# Altium PCB MainPCBV6.PcbDoc (part 3 of 5)
Units mm, origin at the board's own origin, x right, y up, seen from the top; angles counter-clockwise.
Board outline 176 x 144.01 mm, 2 copper layers (Top Layer, Bottom Layer); 220 components, 240 nets, 911 pads, 254 vias.
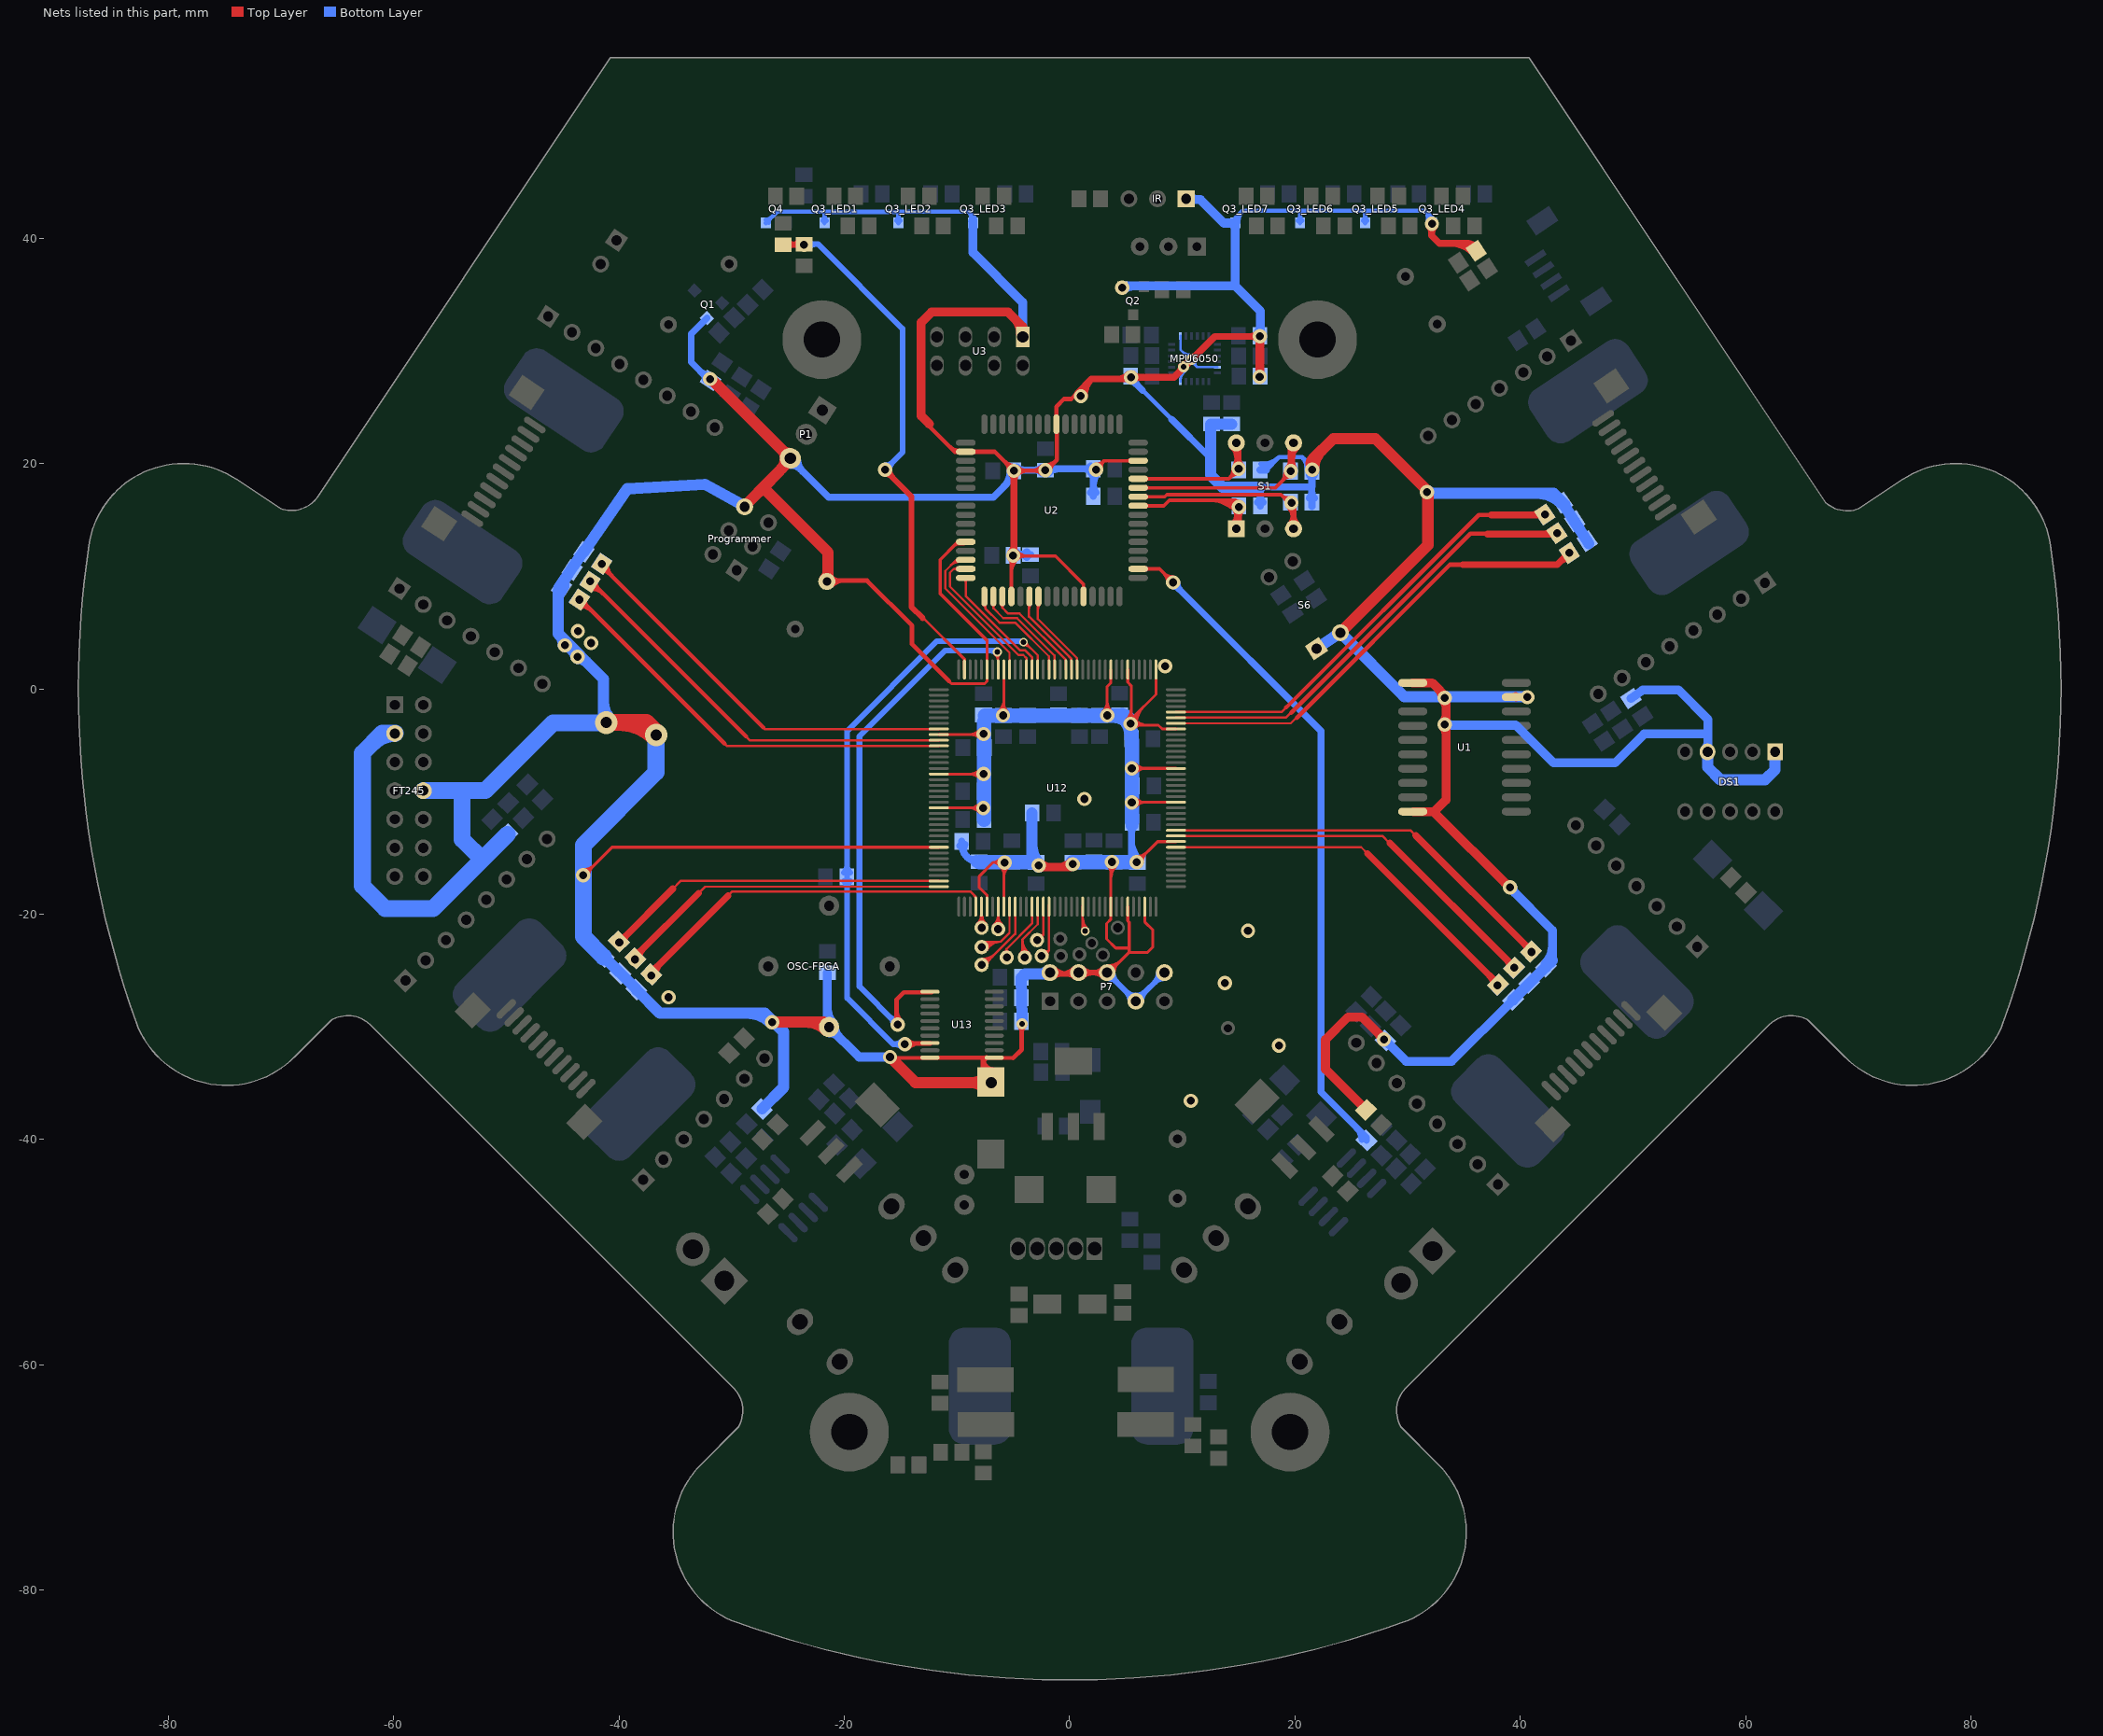
[diagram p3: the nets of this part, all layers, seen from the top]

## Via types
v1: diameter 1.27, hole 0.711, Top Layer to Bottom Layer, 214 vias
v2: diameter 1, hole 0.5, Top Layer to Bottom Layer, 17 vias
v3: diameter 2, hole 1, Top Layer to Bottom Layer, 11 vias
v4: diameter 0.8, hole 0.5, Top Layer to Bottom Layer, 8 vias
v5: diameter 1.778, hole 0.965, Top Layer to Bottom Layer, 3 vias
v6: diameter 0.75, hole 0.5, Top Layer to Bottom Layer, 1 vias

## Nets (pads, with @x,y where several pads share a name; then routed paths per layer and width w, separated by ;. In a path a pad name is that pad's centre, name@x,y a point inside that pad or via, vN(x,y) a via of type N, cw(c..) or ccw(c..) an arc to the next point about the centre after c; other vN are vias at no path point) (continued)
CUR_MAIN_O: R45.1 U2.2 | length 64.3
  Top Layer w0.305: U2.2@6.075,10.65 7.969,10.65 v1(9.169,9.449) ; U2.2@6.762,10.563 cw(c6.971,10.354) 6.971,10.65 cw(c6.971,10.946) U2.2@6.762,10.736 ; v1@8.687,9.449 ccw(c7.522,9.449) 8.346,10.273 ccw(c9.169,11.097) v1@9.169,9.931
  Bottom Layer w0.6: v1@9.119,9.449 v1(9.169,9.449) ; v1@9.169,9.114 cw(c9.169,8.428) 9.655,8.913 ; v1@9.504,9.449 ccw(c10.436,9.449) 9.777,8.79 ; 9.652,8.915 22.314,-3.747 22.314,-35.802 26.354,-39.841 R45.1@26.354,-40.093 ; 25.508,-38.995 cw(c24.481,-40.022) R45.1@25.933,-40.022
D0: U2.46 U12.63 | length 14.5
  Top Layer w0.203: -10.526,10.986 cw(c-9.825,10.285) U2.46@-9.825,11.276 ; -10.179,11.333 cw(c-9.825,10.979) U2.46@-9.825,11.479 ; U2.46@-9.225,11.45 -10.062,11.45 -11.044,10.467 -11.044,8.911 -5.342,3.209 U12.63@-5.342,1.711
D1: U2.47 U12.60 | length 13.4
  Top Layer w0.2: U2.47@-9.968,10.55 ccw(c-10.16,10.416) -10.16,10.65 ; U2.47@-9.968,10.75 cw(c-10.16,10.883) -10.16,10.65 ; U2.47@-9.949,10.526 ccw(c-10.247,10.227) -10.247,10.65 ccw(c-10.247,11.072) U2.47@-9.949,10.773 ; U12.60@-3.842,1.711 -3.842,2.725 -4.123,3.005 -4.555,3.005 -10.643,9.093 -10.643,10.301 -10.294,10.65 -10.16,10.65
D2: U2.48 U12.59 | length 11.5
  Top Layer w0.203: U2.48@-9.347,9.727 cw(c-9.643,9.431) -9.225,9.431 cw(c-8.806,9.431) U2.48@-9.102,9.727 ; U2.48@-9.225,9.85 -9.225,8.26 -4.379,3.414 -3.947,3.414 -3.342,2.809 U12.59@-3.342,1.711
D3: U2.49 U12.56 | length 10.1
  Top Layer w0.203: U2.49@-7.669,7.454 cw(c-7.879,7.13) -7.493,7.13 ; U2.49@-7.575,8.2 -7.493,8.118 -7.493,7.137 -6.236,5.88 -4.839,5.88 -1.842,2.884 U12.56@-1.842,1.711
D4: U2.50 U12.55 | length 10.1
  Top Layer w0.203: U2.50@-6.897,7.477 cw(c-7.193,7.181) -6.775,7.181 cw(c-6.356,7.181) U2.50@-6.652,7.477 ; U2.50@-6.775,8.2 -6.775,7.156 -5.902,6.283 -4.672,6.283 -1.342,2.954 U12.55@-1.342,1.711
D5: U2.51 U12.53 | length 10.3
  Top Layer w0.203: U2.51@-6.095,7.474 cw(c-6.362,7.194) -5.975,7.194 ; U2.51@-5.975,8.2 -5.975,7.194 ; U2.51@-5.855,7.474 ccw(c-5.587,7.194) -5.975,7.194 ; -0.455,2.691 cw(c-0.671,2.475) U12.53@-0.366,2.475 ; U12.53@-0.342,1.711 -0.342,2.578 -4.45,6.686 -5.467,6.686 -5.975,7.194
D6: U2.54 U12.52 | length 9.1
  Top Layer w0.203: U2.54@-3.697,7.477 cw(c-3.916,7.258) -3.607,7.258 ; -3.607,7.104 cw(c-3.079,7.104) U2.54@-3.452,7.477 ; U2.54@-3.575,8.2 -3.607,8.168 -3.607,6.413 0.158,2.649 U12.52@0.158,1.711 ; -0.005,2.811 cw(c-0.341,2.475) U12.52@0.134,2.475
D7: U2.55 U12.51 | length 8.5
  Top Layer w0.203: U2.55@-2.897,7.477 cw(c-3.086,7.289) -2.819,7.289 ; -2.819,7.073 cw(c-2.249,7.073) U2.55@-2.652,7.477 ; U2.55@-2.819,8.155 -2.819,6.196 0.658,2.719 U12.51@0.658,1.711
DIN: U12.65 U13.1 | length 54.9
  Top Layer w0.203: v4@-6.637,3.066 cw(c-7.349,2.353) U12.65@-6.342,2.353 ; v4@-6.494,3.209 cw(c-6.859,2.844) -6.342,2.844 ; U12.65@-6.342,1.711 v4@-6.342,3.302 ; -6.342,2.759 cw(c-5.909,2.759) v4@-6.215,3.066
  Top Layer w0.4: v1@-15.573,-29.512 ccw(c-16.086,-28.999) -15.361,-28.999 ; -15.361,-28.54 ccw(c-13.985,-28.54) v1@-14.958,-29.512 ; v1(-15.265,-29.82) -15.361,-29.724 -15.361,-27.578 -14.732,-26.949 U13.1@-12.243,-26.949
  Bottom Layer w0.508: v1@-15.646,-29.82 ccw(c-16.566,-29.82) -15.916,-29.169 ccw(c-15.265,-28.519) v1@-15.265,-29.439 ; v1@-15.291,-29.794 -18.669,-26.416 -18.669,-4.216 -11.049,3.404 -6.553,3.404 v4(-6.426,3.277) ; -7.085,3.404 cw(c-7.085,2.618) v4@-6.529,3.173
DONE: R32.1 R34.1 U12.71 | length 57.2
  Top Layer w0.254: -13.005,6.299 -9.342,2.637 U12.71@-9.342,1.711 ; -9.453,2.747 cw(c-9.725,2.475) U12.71@-9.34,2.475
  Top Layer w0.508: R34.1@-25.425,39.436 -23.383,39.436 R32.1@-23.343,39.395 ; R34.1@-25.045,39.156 cw(c-24.369,38.48) -24.369,39.436 cw(c-24.369,40.392) R34.1@-25.045,39.716 ; R34.1@-24.676,39.436 ccw(c-24.676,40.462) R32.1@-23.951,39.736 ; -24.578,39.436 cw(c-24.578,38.55) R32.1@-23.951,39.176 ; -24.514,39.436 cw(c-24.514,38.496) R32.1@-23.849,39.161 ; -24.485,39.436 ccw(c-24.485,40.335) R32.1@-23.849,39.699 ; v1@-16.464,19.502 -14.046,17.085 -14.046,7.27 -13.04,6.264 ; v1@-16.383,19.075 cw(c-16.383,18.24) -15.792,18.831 ; v1@-16.002,19.456 ccw(c-14.998,19.456) -15.708,18.747
  Bottom Layer w0.508: v1(-23.579,39.43) -23.538,39.472 -22.352,39.472 -22.327,39.446 -22.301,39.446 ; v1@-23.31,39.161 cw(c-22.559,38.41) -22.559,39.472 ; v1@-23.31,39.699 ccw(c-22.76,40.249) -22.76,39.472 ; -22.285,39.43 -14.834,31.979 -14.834,21.006 v1@-16.459,19.38 ; v1(-16.383,19.456) -16.358,19.456 v1@-16.256,19.355 ; v1@-16.383,19.837 ccw(c-16.383,20.757) -15.733,20.107 ccw(c-15.082,19.456) v1@-16.002,19.456
GND: C7.1 C8.1 C9.1 C10.1 C29.2 C30.1 C31.1 C32.1 C33.2 C34.1 C35.1 C36.1 C37.1 C38.1 C39.1 C40.1 C41.1 C42.1 C43.1 C44.1 C45.1 C46.1 C47.1 C48.1 C49.1 C50.1 C51.1 C52.1 C53.1 C54.1 C55.1 C56.1 C57.1 C58.1 C59.1 C60.1 C101.1 C102.1 C103.1 C104.1 C105.1 C106.1 DS1.1 DS1.4 FB?.1 FT245.3 FT245.8 IR.1 MPU6050.1 MPU6050.11 MPU6050.18 OSC-FPGA.2 P1.3 P7.2 P7.4 P7.6 P7.7 P7.10 Programmer.6 Q1.3 Q2.3 Q3_LED1.3 Q3_LED2.3 Q3_LED3.3 Q3_LED4.3 Q3_LED5.3 Q3_LED6.3 Q3_LED7.3 Q4.3 R3.1 R4.1 R5.1 R6.1 R8.2 R26.2 R46_drivermotor1.1 R46_drivermotor2.1 R46_drivermotor3.1 R46_drivermotor4.1 R47_drivermotor1.1 R47_drivermotor2.1 R47_drivermotor3.1 R47_drivermotor4.1 R48_drivermotor1.1 R48_drivermotor2.1 R48_drivermotor3.1 R48_drivermotor4.1 Reset1.1 S6.1 S6.2 U1.1 U1.10 U1.19 U2.14 U2.24 U2.34 U2.44 U2.52 U2.60 U3.1 U12.9 U12.16 U12.22 U12.29 U12.37 U12.42 U12.45 U12.64 U12.67 U12.81 U12.88 U12.94 U12.101 U12.114 U12.117 U12.136 U12.139 U12.142 U13.10 U13.11 | length 1103.7
  Top Layer w0.254: v1@-43.18,-16.307 ccw(c-43.18,-15.571) -42.66,-16.091 ; v1@-43.18,-16.053 ccw(c-43.18,-14.704) -42.226,-15.658 ; v1@-43.078,-16.51 -40.632,-14.064 U12.101@-11.617,-14.064 ; v1@-42.672,-16.561 cw(c-41.568,-16.561) -42.349,-15.78 ; U12.94@-11.617,-10.564 v1@-7.62,-10.564 ; U12.88@-11.617,-7.564 -7.702,-7.564 v1@-7.696,-7.569 ; U12.81@-11.617,-4.064 v1@-7.569,-4.064 ; -10.719,0.686 -10.49,0.457 -7.544,0.457 -7.342,0.659 U12.67@-7.342,1.711 -7.342,4.294 ; -8.994,-4.064 ccw(c-8.994,-2.665) v1@-8.005,-3.654 ; -8.965,-10.564 cw(c-8.965,-11.886) v1@-8.03,-10.951 ; -8.885,-7.564 cw(c-8.885,-8.809) v1@-8.005,-7.928 ; -8.859,-7.564 ccw(c-8.859,-6.356) v1@-8.005,-7.21 ; -8.83,-10.564 ccw(c-8.83,-9.433) v1@-8.03,-10.233 ; -8.75,-4.064 cw(c-8.75,-5.117) v1@-8.005,-4.372 ; -8.381,-4.064 ccw(c-8.381,-3.278) v1@-7.825,-3.834 ; -8.352,-10.564 cw(c-8.352,-11.273) v1@-7.85,-10.771 ; U12.114@-7.342,-19.339 -7.342,-18.312 -8.052,-17.602 -8.052,-16.662 -6.807,-15.418 ; v1@-6.277,-2.003 ccw(c-7.328,-0.952) -5.842,-0.952 ; v1@-6.198,-15.723 ccw(c-6.807,-16.18) -6.807,-15.418 ; v1@-6.198,-15.113 cw(c-6.807,-14.656) -6.807,-15.418 ; v1@-6.15,-15.777 cw(c-6.894,-16.521) -5.842,-16.521 ; v1@-6.098,-2.183 ccw(c-6.715,-1.566) -5.842,-1.566 ; v1@-5.867,-15.418 -6.807,-15.418 ; v1@-5.867,-2.413 -5.842,-2.388 U12.64@-5.842,1.711 ; U12.117@-5.842,-19.339 v1@-5.842,-15.418 ; -5.842,-16.767 cw(c-4.442,-16.767) v1@-5.432,-15.777 ; -5.842,-16.154 cw(c-5.055,-16.154) v1@-5.612,-15.597 ; -5.842,-1.319 ccw(c-4.875,-1.319) v1@-5.559,-2.003 ; v1@2.921,-2.413 3.327,-2.007 3.327,0.203 3.658,0.534 U12.45@3.658,1.711 ; v1@2.968,-2.003 ccw(c2.101,-1.136) 3.327,-1.136 ccw(c4.554,-1.136) v1@3.687,-2.003 ; P7.6@3.305,-25.175 P7.6@3.378,-25.248 ; P7.6@3.327,-24.828 ccw(c3.327,-23.569) 4.217,-24.459 ; P7.6@3.327,-24.574 ccw(c3.327,-22.702) 4.651,-24.026 ; P7.6@3.378,-25.171 3.505,-25.171 5.283,-23.393 5.283,-20.731 5.158,-20.605 U12.139@5.158,-19.339 ; v1@3.4,-15.726 cw(c2.778,-16.349) 3.658,-16.349 ; 3.658,-16.838 cw(c5.23,-16.838) v1@4.118,-15.726 ; 3.658,-16.225 cw(c4.617,-16.225) v1@3.939,-15.547 ; v1@3.658,-15.341 U12.136@3.658,-19.339 3.658,-20.454 3.277,-20.835 3.277,-22.2 4.089,-23.012 5.283,-23.012 ; P7.6@3.95,-25.197 cw(c5.087,-25.197) 4.283,-24.393 ; v1@5.051,-2.74 ccw(c4.061,-1.75) 5.461,-1.75 ; U12.42@5.158,1.711 5.158,0.583 5.461,0.279 5.461,-3.226 7.874,-3.226 8.212,-3.564 U12.29@9.433,-3.564 ; v1@5.207,-3.175 5.639,-3.175 5.664,-3.15 5.664,-2.489 7.658,-0.496 U12.37@7.658,1.711 ; v1@5.231,-2.919 ccw(c4.674,-2.363) 5.461,-2.363 ; 5.334,-23.419 6.883,-23.419 7.391,-22.911 7.391,-21.42 6.658,-20.687 U12.142@6.658,-19.339 ; v1(5.41,-3.099) cw(c6.269,-3.099) 5.662,-2.492 ; v1@5.41,-2.591 ccw(c5.41,-2.223) 5.67,-2.483 ; v1@5.461,-10.058 5.466,-10.064 U12.16@9.433,-10.064 ; 5.461,-1.995 ccw(c6.514,-1.995) 5.769,-2.74 ccw(c6.943,-1.566) 6.943,-3.226 ; v1@5.486,-7.064 U12.22@9.433,-7.064 ; v1@5.59,-2.919 ccw(c6.33,-2.179) 6.33,-3.226 ccw(c6.33,-4.019) v1@5.769,-3.458 ; v1@5.664,-3.099 cw(c7.136,-3.099) 6.095,-2.058 ; v1@5.691,-10.263 cw(c6.173,-10.745) 6.173,-10.064 ; v1@5.871,-10.443 cw(c6.787,-11.359) 6.787,-10.064 ; v1@5.871,-9.725 ccw(c6.69,-8.906) 6.69,-10.064 ; v1@5.871,-7.42 cw(c6.732,-8.281) 6.732,-7.064 ; v1@5.871,-6.702 ccw(c6.745,-5.828) 6.745,-7.064 ; v1@5.918,-3.099 cw(c8.003,-3.099) 6.529,-1.625 ; v1@5.944,-15.138 ccw(c5.944,-14.464) 6.421,-14.941 ; v1@5.944,-14.884 ccw(c5.944,-13.597) 6.854,-14.507 ; v1@5.969,-15.392 7.798,-13.564 U12.9@9.433,-13.564 ; v1@6.452,-15.392 cw(c7.617,-15.392) 6.793,-14.569
  Top Layer w0.305: -10.183,12.779 cw(c-9.825,12.42) U2.44@-9.825,12.927 ; U2.44@-9.861,12.932 ccw(c-9.927,12.719) -10.085,12.877 ; U2.44@-9.225,13.05 -9.397,12.877 -10.085,12.877 ; -7.342,4.294 -11.498,8.45 -11.498,11.463 -10.085,12.877 ; v1@-5.36,11.495 cw(c-5.808,11.047) -5.175,11.047 ; U2.52@-5.261,8.886 ccw(c-5.471,9.096) -5.175,9.096 ccw(c-4.879,9.096) U2.52@-5.088,8.886 ; U2.52@-5.175,8.2 -5.175,11.764 -5.197,11.786 -1.27,11.786 1.225,9.29 U2.60@1.225,8.2 ; -5.175,10.295 cw(c-3.478,10.295) -4.678,11.495 cw(c-3.977,10.794) -3.977,11.786 ; -5.175,11.031 cw(c-4.214,11.031) v1@-4.893,11.711 ; v1@-4.678,12.178 ccw(c-3.731,13.124) -3.731,11.786 ; U2.60@1.139,8.886 ccw(c0.929,9.096) 1.225,9.096 ccw(c1.521,9.096) U2.60@1.312,8.886 ; v1@2.098,19.533 2.337,19.533 3.051,20.247 6.073,20.247 U2.14@6.075,20.25 ; v1@2.337,19.939 ccw(c2.337,20.92) 3.031,20.226 ; v1@2.814,19.528 cw(c3.646,19.652) 3.051,20.247 ; 5.173,20.247 ccw(c5.173,20.552) U2.14@5.389,20.336 ; 5.185,20.247 cw(c5.185,19.96) U2.14@5.389,20.163
  Top Layer w0.381: -12.471,23.52 -12.471,23.317 -10.204,21.05 U2.34@-9.225,21.05 -6.638,21.05 v1(-4.943,19.355) -4.94,19.357 -2.095,19.357 -1.134,20.319 -1.134,23.458 U2.24@-1.175,23.5 -1.175,25.063 -0.508,25.73 0.127,25.73 v1@0.686,26.289 ; -10.616,21.462 ccw(c-9.825,22.253) U2.34@-9.825,21.134 ; v1@-5.387,19.355 ccw(c-6.46,19.355) -5.702,20.114 ccw(c-4.943,20.872) v1@-4.943,19.799 ; v1@-4.628,19.04 cw(c-3.864,18.276) -3.864,19.357 ; v1@-4.628,19.669 ccw(c-3.876,20.422) -3.876,19.357 ; -3.385,19.357 ccw(c-3.385,20.647) v1@-2.473,19.735 ; -3.079,19.357 cw(c-3.079,18.501) v1@-2.473,19.106 ; v1@-2.159,19.865 ccw(c-2.159,21.245) -1.183,20.269 ; v1@-1.714,19.421 cw(c-0.948,19.421) -1.49,19.963 ; U2.24@-1.235,22.84 cw(c-1.479,22.596) -1.134,22.596
  Top Layer w0.4: Reset1.1@-21.488,9.601 -17.983,9.601 -13.995,5.613 -13.995,3.962 -10.719,0.686 ; Reset1.1@-21.155,9.133 cw(c-20.024,8.002) -20.024,9.601 ; Reset1.1@-21.155,9.928 ccw(c-20.367,10.716) -20.367,9.601 ; v1@-15.846,-32.795 -12.426,-32.745 U13.10@-12.4,-32.745 -7.722,-32.745 ; FB?.1@-7.722,-33.887 ccw(c-6.563,-33.887) FB?.1@-6.96,-34.976 ; FB?.1@-7.722,-33.706 ccw(c-6.809,-33.706) FB?.1@-6.974,-34.603 ; -7.722,-33.52 cw(c-6.6,-33.52) U13.11@-7.393,-32.727 ; -7.722,-33.316 ccw(c-6.355,-33.316) FB?.1@-6.823,-34.6 ; -7.722,-33.225 ccw(c-6.72,-33.225) FB?.1@-6.902,-34.21 ; -7.722,-33.091 cw(c-7.349,-33.091) U13.11@-7.377,-32.72 ; FB?.1@-7.674,-34.615 ccw(c-7.904,-34.498) FB?.1@-7.722,-34.315 ; FB?.1@-7.439,-34.336 cw(c-7.569,-34.163) FB?.1@-7.722,-34.315 ; FB?.1@-7.214,-34.823 FB?.1@-7.722,-34.315 ; FB?.1@-6.829,-33.817 cw(c-6.632,-32.745) -7.722,-32.745 ; FB?.1@-6.686,-34.224 cw(c-6.147,-32.745) -7.722,-32.745 ; v2@-4.454,-29.956 cw(c-4.905,-30.406) -4.267,-30.406 ; -4.267,-30.529 cw(c-3.456,-30.529) v2@-4.03,-29.956 ; v2@-3.988,-29.794 -4.267,-30.074 -4.267,-32.029 -5.033,-32.795 -6.726,-32.745 -7.722,-32.745 ; FB?.1@-7.722,-34.315 -7.722,-32.745
  Top Layer w0.508: P7.2@-1.829,-25.095 P7.2@-1.74,-25.184 ; P7.2@-1.6,-25.324 0.787,-25.324 0.914,-25.197 P7.6@3.302,-25.197 ; P7.2@-1.402,-25.548 cw(c-0.862,-26.088) -0.862,-25.324 ; P7.2@-1.402,-24.846 ccw(c-0.249,-23.693) -0.249,-25.324 ; -0.717,-25.324 ccw(c-0.717,-23.693) P7.4@0.437,-24.846 ; -0.103,-25.324 cw(c-0.103,-26.088) P7.4@0.437,-25.548 ; P7.4@1.138,-25.548 cw(c1.985,-26.394) 1.985,-25.197 cw(c1.985,-23.999) P7.4@1.138,-24.846 ; P7.6@2.977,-25.548 ccw(c2.13,-26.394) 2.13,-25.197 ccw(c2.13,-23.999) P7.6@2.977,-24.846
  Top Layer w0.6: v1@0.699,26.276 1.93,27.508 ; v1@1.325,25.993 cw(c3.392,26.046) 1.93,27.508 ; 4.259,27.508 ccw(c4.259,28.837) v1@5.199,27.897 ; v1@5.334,27.508 1.93,27.508 ; v1(5.436,27.661) 9.271,27.661 12.903,31.293 v1(16.891,31.293) ; v1@5.672,27.424 cw(c6.244,26.852) 6.244,27.661 cw(c6.244,28.469) v1@5.672,27.897 ; 9.696,28.086 ccw(c9.181,28.6) v2@9.909,28.6 ; v2@10.078,28.798 ccw(c9.953,29.593) v2@10.65,29.191 ; v2@10.109,28.8 ccw(c10.109,29.529) v2@10.624,29.014 ; v2@10.443,28.833 ccw(c10.015,29.261) v2@10.62,29.261 ; v2@10.82,29.461 ccw(c10.82,30.066) 11.249,29.638 ; v1@16.654,31.056 ccw(c16.082,30.484) 16.082,31.293 ccw(c16.082,32.102) v1@16.654,31.53 ; v1@31.92,41.038 cw(c31.409,40.528) 32.131,40.528 ; 32.131,40.405 cw(c33.026,40.405) v1@32.393,41.038 ; v1@32.131,41.351 32.131,40.234 32.817,39.548 35.43,39.548 ; 33.787,39.548 cw(c33.787,36.71) R8.2@35.793,38.717 ; 35.236,39.548 cw(c35.236,38.159) R8.2@36.218,39.141 ; 35.463,39.514 cw(c34.913,38.964) R8.2@35.691,38.964 ; R8.2@36.027,39.314 cw(c35.996,40.114) 35.43,39.548 ; R8.2@36.096,38.881 35.43,39.548
  Top Layer w0.635: v1@-5.244,12.061 ccw(c-5.969,12.787) -4.943,12.787 ; v1@-5.197,11.786 -4.943,12.04 v1(-4.943,19.355) ; v1@-5.167,19.13 cw(c-5.709,18.588) -4.943,18.588 cw(c-4.176,18.588) v1@-4.718,19.13
  Top Layer w0.75: v1(-2.743,-15.672) -2.575,-15.84 v1@0.035,-15.84 ; v1@-2.559,-15.488 ccw(c-1.708,-14.637) -1.708,-15.84 ; -1.001,-15.84 ccw(c-1.001,-14.29) v1@0.096,-15.386
  Top Layer w0.8: -12.471,23.52 -13.183,24.232 -13.183,32.537 -12.268,33.452 -5.461,33.452 -4.166,32.156 U3.1@-4.166,31.242 ; -4.941,32.932 cw(c-6.332,31.542) U3.1@-4.366,31.542 ; v1(16.866,27.686) 16.891,27.711 v1(16.891,31.293) ; C60.1@26.303,-37.377 22.708,-33.782 22.708,-31.14 24.714,-29.134 25.933,-29.134 v1@27.915,-31.115 ; 27.452,-30.653 cw(c26.964,-31.14) v1@27.654,-31.14 ; U1.1@30.452,0.533 32.182,0.533 33.401,-0.686 33.401,-9.855 32.334,-10.922 ; U1.10@30.505,-10.922 32.334,-10.922 ; 32.737,-0.021 cw(c31.945,-0.813) v1@33.064,-0.813 ; v1@33.133,-3.341 cw(c32.487,-3.988) 33.401,-3.988 ; v1@33.133,-3.009 ccw(c32.487,-2.362) 33.401,-2.362 ; v1@33.133,-0.979 cw(c32.487,-1.625) 33.401,-1.625 ; 38.603,-17.191 ccw(c39.091,-16.703) v1@39.091,-17.393 ; v1@39.065,-17.653 32.334,-10.922 ; U1.19@39.599,-0.686 U1.19@39.624,-0.711
  Top Layer w1: v1@-31.75,27.407 -31.74,27.407 P1.3@-24.797,20.463 -24.562,20.228 -24.882,20.228 -26.518,18.593 ; Programmer.6@-28.858,16.153 -28.858,16.227 -26.518,18.567 ; -27.14,17.793 -21.463,12.116 Reset1.1@-21.463,9.601 ; v1(-26.416,-29.591) -21.844,-29.591 OSC-FPGA.2@-21.438,-29.997 ; -25.676,19.435 ccw(c-26.732,20.491) -25.238,20.491 ccw(c-26.238,20.491) -25.531,21.197 ; -25.498,21.164 ccw(c-24.838,21.823) P1.3@-24.838,20.891 ; -23.378,-29.591 cw(c-23.378,-32.042) OSC-FPGA.2@-21.644,-30.309 ; Reset1.1@-21.738,9.715 ccw(c-22.402,10.379) -21.463,10.379 ; v1(-15.951,-32.69) -15.846,-32.795 -13.691,-34.95 FB?.1@-6.909,-34.95 ; -8.82,-34.95 cw(c-8.82,-36.81) FB?.1@-7.505,-35.495 ; -8.581,-34.95 ccw(c-8.581,-33.43) FB?.1@-7.505,-34.505 ; -8.228,-34.95 cw(c-8.228,-36.244) FB?.1@-7.313,-35.329 ; FB?.1@-8.105,-34.95 ccw(c-8.105,-33.83) FB?.1@-7.313,-34.622 ; v1@21.61,19.551 cw(c22.053,19.984) 21.615,20.422 ; v1@21.615,19.355 21.615,20.422 ; v1@21.649,19.456 cw(c24.06,19.456) 22.355,21.161 ; S6.2@24.026,4.986 31.801,12.761 31.801,17.551 27.153,22.2 23.393,22.2 21.615,20.422
  Top Layer w1.5: v3(-41.148,-2.997) -37.567,-2.997 v3@-36.538,-4.026 ; -39.943,-2.997 cw(c-39.943,-7.33) v3@-36.88,-4.266 ; -37.291,-3.272 cw(c-38.108,-4.089) v3@-36.953,-4.089
  Bottom Layer w0.2: MPU6050.18@9.83,27.275 cw(c11.062,27.275) v2@10.343,28.276 ; MPU6050.18@9.83,27.305 9.83,28.27 v2@10.719,29.159 ; 9.83,27.665 cw(c10.781,27.665) v2@10.226,28.438 ; 9.83,28.055 cw(c10.501,28.055) v2@10.109,28.6 ; MPU6050.1@9.832,31.337 9.832,30.096 10.744,29.185 v2@10.719,29.159 ; 9.877,30.051 ccw(c10.82,30.994) v2@10.82,29.661 ; v2@10.183,28.994 ccw(c10.294,29.584) v2@10.719,29.159 ; 10.219,29.71 ccw(c10.82,30.312) v2@10.82,29.461 ; 10.245,29.683 cw(c9.823,29.261) 10.42,29.261 cw(c9.455,29.261) 10.138,28.578 cw(c10.82,27.895) v2@10.82,28.861 ; v2@10.509,28.618 cw(c11.227,28.651) v2@10.719,29.159
  Bottom Layer w0.203: v2@10.693,29.185 10.719,29.159 11.316,28.562 ; v2@10.82,28.862 cw(c10.82,28.391) 11.154,28.724 ; v2@11.003,29.193 ccw(c11.365,29.059) 11.092,28.786 ; v2@11.194,29.122 ccw(c11.692,28.937) 11.316,28.562 ; MPU6050.11@13.107,28.562 11.316,28.562
  Bottom Layer w0.4: Q4.3@-26.98,41.359 -25.972,42.367 -21.742,42.367 -21.717,42.342 ; Q4.3@-26.98,41.634 ccw(c-26.98,42.298) -26.511,41.829 ; Q4.3@-26.73,41.384 cw(c-26.187,41.384) Q4.3@-26.571,41.768 ; Q3_LED1.3@-21.942,41.561 ccw(c-22.369,41.988) -21.765,41.988 ccw(c-21.162,41.988) Q3_LED1.3@-21.588,41.561 ; Q3_LED1.3@-21.765,41.359 -21.765,42.314 -21.793,42.342 -21.717,42.342 ; Q3_LED2.3@-15.389,41.561 ccw(c-15.816,41.988) -15.212,41.988 ccw(c-14.608,41.988) Q3_LED2.3@-15.035,41.561 ; -15.215,42.316 -15.212,42.314 Q3_LED2.3@-15.212,41.359 ; Q3_LED3.3@-8.812,41.49 ccw(c-9.515,41.819) -8.966,42.367 ; Q3_LED3.3@-8.721,41.595 ccw(c-8.94,41.935) -8.534,41.935 ; -8.563,41.964 cw(c-8.965,41.561) Q3_LED3.3@-8.45,41.321 ; Q3_LED3.3@-8.534,41.3 -8.534,41.935 ; -8.534,41.865 ccw(c-8.105,41.865) Q3_LED3.3@-8.409,41.561 ; 6.474,26.496 9.042,23.927 ; Q3_LED7.3@14.701,41.359 14.701,41.778 15.367,42.443 ; Q3_LED7.3@14.951,41.392 cw(c16.373,41.438) 15.367,42.443 ; R6.1@16.906,19.581 ccw(c17.032,20.931) 17.991,19.972 ; R6.1@16.943,19.979 ccw(c17.135,22.032) 18.593,20.574 ; R6.1@17.45,19.431 18.593,20.574 ; Q3_LED6.3@20.273,41.561 ccw(c19.846,41.988) 20.45,41.988 ccw(c21.053,41.988) Q3_LED6.3@20.626,41.561 ; 20.447,42.393 20.45,42.39 Q3_LED6.3@20.45,41.359 ; 20.857,20.395 ccw(c22.168,20.664) R4.1@21.53,19.487 ; R4.1@21.049,19.456 ccw(c19.594,19.543) 20.625,20.574 ; R4.1@21.079,19.461 ccw(c19.529,19.478) 20.625,20.574 ; R4.1@21.161,20.037 ccw(c21.514,20.39) R4.1@21.514,19.891 ; R4.1@21.193,20.006 ccw(c21.499,20.312) R4.1@21.499,19.879 ; R4.1@21.539,19.66 20.625,20.574 ; Q3_LED5.3@26.051,41.561 ccw(c25.624,41.988) 26.228,41.988 ccw(c26.832,41.988) Q3_LED5.3@26.405,41.561 ; Q3_LED5.3@26.228,41.359 26.228,42.433 26.238,42.443 ; Q3_LED4.3@31.753,41.437 ccw(c30.888,41.784) 31.547,42.443 ; 31.836,41.878 ccw(c32.7,42.002) Q3_LED4.3@32.177,41.303 ; Q3_LED4.3@31.903,41.414 ccw(c30.666,41.562) 31.547,42.443 ; 31.975,42.015 cw(c31.499,41.539) Q3_LED4.3@32.124,41.288 ; v1@32.129,41.861 cw(c31.705,41.438) Q3_LED4.3@32.3,41.366 ; Q3_LED4.3@32.182,41.351 32.182,41.808 31.547,42.443 ; -21.717,42.342 -15.138,42.342 -15.113,42.367 -8.966,42.367 ; -8.966,42.367 -8.534,41.935 ; 15.367,42.443 26.238,42.443 ; 18.593,20.574 20.625,20.574 ; 26.238,42.443 31.547,42.443
  Bottom Layer w0.508: P7.6@3.327,-25.693 cw(c3.327,-26.89) 4.174,-26.044 cw(c5.021,-25.197) P7.6@3.823,-25.197 ; P7.6@3.327,-25.197 5.817,-27.686 P7.7@5.918,-27.686 ; P7.7@5.371,-27.737 ccw(c4.174,-27.737) 5.021,-26.89 ccw(c5.867,-26.043) 5.867,-27.241 ccw(c5.867,-26.043) 6.714,-26.89 ccw(c7.561,-27.737) P7.7@6.363,-27.737 ; P7.7@5.867,-27.737 P7.7@5.944,-27.813 ; P7.7@5.994,-27.686 P7.7@5.918,-27.686 ; P7.10@7.911,-25.197 cw(c6.714,-25.197) 7.561,-26.044 cw(c8.407,-26.89) P7.10@8.407,-25.693 ; P7.10@8.458,-25.146 P7.7@5.918,-27.686
  Bottom Layer w0.6: -32.803,28.206 ccw(c-31.928,29.081) C7.1@-31.928,27.843 ; -32.665,28.068 ccw(c-31.979,28.754) C7.1@-31.979,27.784 ; -32.54,27.943 cw(c-33.049,27.434) C7.1@-32.329,27.434 ; Q1.3@-32.198,32.912 -33.604,31.506 -33.604,29.007 C7.1@-31.979,27.381 ; C7.1@-31.961,27.313 -31.864,27.216 C7.1@-31.864,27.064 ; C30.1@5.417,27.296 cw(c5.417,26.709) C30.1@5.832,27.124 ; C30.1@5.417,27.538 6.46,26.496 6.474,26.496 ; C30.1@5.767,27.646 ccw(c6.871,27.646) 6.091,26.865 ; C30.1@5.771,27.661 ccw(c6.918,27.661) 6.107,26.849 ; 9.042,23.927 12.421,20.549 12.421,20.345
  Bottom Layer w0.635: P1.3@-24.968,20.574 -21.412,17.018 -6.782,17.018 -4.943,18.857 v1(-4.943,19.355) -4.877,19.421 v1(-2.159,19.421) ; P1.3@-24.755,19.853 cw(c-24.755,18.625) -23.887,19.493 ; P1.3@-24.173,20.435 ccw(c-22.587,20.435) -23.708,19.314 ; C54.1@-9.752,-13.926 cw(c-10.083,-14.5) -9.444,-14.328 ; C54.1@-9.586,-13.538 -9.586,-13.797 ccw(c-8.026,-13.797) C44.1@-8.026,-15.357 ; -9.396,-14.508 cw(c-8.513,-14.272) C54.1@-9.3,-13.807 ; -8.849,-15.136 cw(c-9.016,-15.757) C44.1@-8.43,-15.493 ; -8.835,-15.14 ccw(c-8.65,-14.45) C44.1@-8.293,-15.069 ; -5.837,17.963 ccw(c-7.229,19.355) C103.1@-5.26,19.355 ; -5.792,18.008 ccw(c-7.038,19.255) C103.1@-5.275,19.255 ; v1(-5.019,11.836) -5.146,11.836 -5.06,11.923 C102.1@-3.48,11.923 ; C106.1@-4.794,11.612 cw(c-4.044,10.861) C102.1@-4.044,11.923 ; C106.1@-4.784,11.701 cw(c-4.249,11.167) -4.249,11.923 ; C106.1@-4.784,12.172 ccw(c-4.183,12.772) C102.1@-4.183,11.923 ; C106.1@-4.744,12.123 ccw(c-4.39,12.365) -4.279,11.951 ; C103.1@-4.718,19.13 cw(c-4.017,18.429) -4.017,19.421 ; C103.1@-4.708,19.22 cw(c-4.222,18.734) -4.222,19.421 ; C103.1@-4.708,19.69 ccw(c-4.058,20.34) -4.058,19.421 ; C102.1@-3.815,11.688 ccw(c-4.383,11.12) -4.383,11.923 ccw(c-4.383,12.726) C102.1@-3.815,12.158 ; C104.1@-2.494,19.186 ccw(c-3.062,18.618) -3.062,19.421 ccw(c-3.062,20.224) C104.1@-2.494,19.656 ; C104.1@-2.384,19.196 ccw(c-2.926,18.654) -2.926,19.421 ccw(c-2.926,20.187) C104.1@-2.384,19.645 ; C104.1@-2.095,19.357 -1.92,19.533 C105.1@2.098,19.533 C101.1@2.098,17.094 ; C104.1@-1.934,19.196 cw(c-1.123,18.384) -1.123,19.533 ; C104.1@-1.824,19.186 cw(c-0.986,18.348) -0.986,19.533 ; 1.386,19.533 cw(c1.386,18.506) C105.1@2.112,19.232 ; C101.1@1.863,17.429 ccw(c1.295,17.997) 2.098,17.997 ccw(c2.901,17.997) C101.1@2.333,17.429 ; C105.1@1.863,19.197 cw(c1.295,18.63) 2.098,18.63 cw(c2.901,18.63) C105.1@2.333,19.197 ; C105.1@1.863,19.297 ccw(c1.295,18.73) 1.295,19.533 ccw(c1.295,20.335) C105.1@1.863,19.768 ; 2.098,18.113 cw(c3.68,18.113) C105.1@2.561,19.232 ; C47.1@5.292,-12.197 cw(c4.847,-12.642) 5.476,-12.642 ; C39.1@5.476,-14.889 C47.1@5.476,-12.497 ; 5.476,-13.595 ccw(c7.707,-13.595) C39.1@6.13,-15.172 ; 5.476,-13.497 ccw(c7.839,-13.497) C39.1@6.168,-15.168 ; 5.476,-12.887 cw(c6.452,-12.887) C47.1@5.762,-12.197 ; 5.63,-14.308 cw(c4.767,-14.806) C39.1@5.659,-15.251 ; R3.1@16.691,16.566 ccw(c16.124,17.133) 16.927,17.133 ccw(c17.729,17.133) R3.1@17.162,16.566 ; R6.1@16.901,19.431 R6.1@17.45,19.431 ; R3.1@16.927,16.231 16.927,17.907 16.927,17.932 21.448,17.932 ; R5.1@21.263,16.921 ccw(c20.721,17.464) 21.488,17.464 ; R4.1@21.263,18.994 cw(c20.696,18.427) 21.499,18.427 cw(c22.301,18.427) R4.1@21.734,18.994 ; R4.1@21.289,19.232 cw(c20.784,18.727) R4.1@21.499,18.727 ; R5.1@21.488,16.561 21.488,17.973 21.499,17.983 R4.1@21.499,19.329 ; 21.488,17.514 ccw(c22.326,17.514) R5.1@21.734,16.921 ; R5.1@21.499,16.205 R5.1@21.499,16.535 ; R4.1@21.499,18.653 cw(c22.317,18.653) R4.1@21.738,19.232
  Bottom Layer w0.8: OSC-FPGA.2@-21.514,-29.87 C33.2@-21.514,-25.207 ; -21.514,-28.451 ccw(c-19.786,-28.451) OSC-FPGA.2@-21.008,-29.673 ; OSC-FPGA.2@-21.361,-30.526 cw(c-21.361,-31.733) -20.508,-30.88 cw(c-19.654,-30.026) OSC-FPGA.2@-20.861,-30.026 ; OSC-FPGA.2@-21.361,-30.026 -18.698,-32.69 v1@-16.002,-32.69 ; Q3_LED3.3@-8.585,41.359 -8.585,38.735 -4.166,34.315 U3.1@-4.166,31.14 ; v1@4.699,35.763 4.704,35.769 14.701,35.769 ; v1@4.814,35.445 cw(c5.597,34.662) 5.597,35.769 ; IR.1@10.389,43.434 11.608,43.434 13.691,41.351 Q3_LED7.3@14.681,41.351 ; IR.1@10.585,43.758 ccw(c11.367,44.539) 11.367,43.434 ; Q3_LED7.3@14.701,41.359 14.701,35.769 ; R26.2@16.707,31.62 ccw(c16.202,32.126) 16.916,32.126 ; R26.2@16.916,31.318 16.916,33.553 14.701,35.769 ; C8.1@27.889,-31.375 cw(c27.889,-32.072) C8.1@28.382,-31.579 ; C8.1@28.03,-31.228 29.873,-33.071 33.909,-33.071 R46_drivermotor3.1@39.319,-27.661 ; v1@33.274,-3.226 39.599,-3.226 42.951,-6.579 48.412,-6.579 50.993,-3.998 56.479,-3.998 56.667,-3.81 ; v1@33.466,-3.009 ccw(c33.989,-2.485) 33.989,-3.226 ; v1@39.052,-17.64 42.85,-21.438 42.85,-24.11 ; v1@39.326,-17.628 ccw(c40.016,-17.628) 39.528,-18.115 ; R48_drivermotor3.1@42.184,-24.423 ccw(c40.576,-22.815) 42.85,-22.815 ; C59.1@49.816,-0.861 50.876,-0.102 54.051,-0.102 56.667,-2.718 56.667,-3.81 ; DS1.4@56.411,-5.343 ccw(c55.792,-4.724) 56.667,-4.724 ; DS1.4@56.667,-5.613 56.667,-3.81
  Bottom Layer w1: -45.415,7.945 cw(c-44.212,7.945) R48_drivermotor1.1@-45.063,8.796 ; R48_drivermotor1.1@-45.367,8.934 -45.263,9.087 R47_drivermotor1.1@-44.233,10.6 ; -45.341,4.828 cw(c-46.309,3.861) v1@-44.941,3.861 ; R48_drivermotor1.1@-45.113,8.985 -45.415,8.683 -45.415,4.902 -41.377,0.864 v3@-41.377,-3.023 ; R48_drivermotor1.1@-44.911,9.096 cw(c-43.95,9.279) -44.758,9.829 ; v1@-44.806,3.726 cw(c-44.806,2.357) v1@-43.838,3.325 ; v1@-44.512,3.714 cw(c-45.257,2.424) v1@-43.818,2.81 ; R47_drivermotor1.1@-44.335,10.473 -43.169,12.185 R46_drivermotor1.1@-43.078,12.319 ; -44.152,3.639 cw(c-44.946,2.845) v1@-43.823,2.845 ; v1@-43.688,2.71 cw(c-43.688,1.587) -42.894,2.381 ; R46_drivermotor1.1@-43.132,12.16 -39.268,17.755 -32.41,18.161 -28.828,16.207 Programmer.6@-28.778,16.18 ; -41.377,-1.238 ccw(c-39.389,-1.238) v3@-40.794,-2.644 ; R46_drivermotor2.1@-41.36,-23.779 -38.43,-26.708 R48_drivermotor2.1@-38.43,-26.744 ; R48_drivermotor2.1@-38.48,-26.694 R48_drivermotor2.1@-38.43,-26.744 ; -29.489,16.567 cw(c-29.879,15.853) Programmer.6@-29.098,16.082 ; -28.643,-28.804 cw(c-28.643,-31.818) v1@-26.511,-29.686 ; C9.1@-27.319,-37.301 -25.4,-35.382 -25.4,-30.455 -27.051,-28.804 -36.37,-28.804 R48_drivermotor2.1@-38.43,-26.744 ; C57.1@-4.318,-25.654 C57.1@-4.298,-25.634 ; C56.1@-4.242,-29.362 -4.243,-29.286 -4.271,-27.432 -4.297,-25.654 C57.1@-4.298,-25.634 ; C57.1@-4.192,-25.609 cw(c-3.476,-26.325) -3.476,-25.313 ; C48.1@-3.338,-15.382 C37.1@-3.338,-11.024 ; -3.338,-14.465 ccw(c-2.155,-14.465) C48.1@-2.991,-15.302 ; -3.338,-13.911 ccw(c-0.982,-13.911) C48.1@-2.648,-15.576 ; -2.636,-25.313 ccw(c-2.636,-24.314) P7.2@-1.929,-25.02 ; P7.2@-1.753,-25.197 -1.868,-25.313 -3.977,-25.313 C57.1@-4.298,-25.634 ; C32.1@12.497,23.51 12.497,18.974 13.564,17.907 16.927,17.907 ; C32.1@12.598,23.51 C29.2@14.387,23.51 ; S6.1@21.912,3.577 24.022,4.991 S6.2@24.079,5.029 ; S6.2@24.026,4.986 29.723,-0.711 v1@40.564,-0.711 ; v1@31.801,17.526 31.979,17.348 42.977,17.348 R48_drivermotor4.1@43.942,16.383 ; v1@31.82,17.571 ccw(c32.357,18.108) 32.357,17.348 ; R46_drivermotor3.1@39.319,-27.61 39.35,-27.61 R48_drivermotor3.1@42.29,-24.671 42.85,-24.11 ; 41.547,17.348 cw(c41.547,14.473) R48_drivermotor4.1@43.58,16.506 ; R48_drivermotor4.1@43.742,16.529 44.813,14.865 45.938,13.116 R46_drivermotor4.1@46.076,12.903 ; DS1.4@56.623,-5.613 56.623,-6.941 57.76,-8.077 61.722,-8.077 62.611,-7.188 DS1.1@62.611,-5.715
  Bottom Layer w1.27: C44.1@-8.026,-15.382 C48.1@-3.338,-15.382 ; C42.1@-7.61,-11.608 C43.1@-7.61,-9.093 C50.1@-7.61,-2.967 ; C50.1@-7.511,-2.377 C35.1@0.925,-2.377 ; C48.1@-3.442,-15.382 cw(c-3.442,-16.371) v1(-2.743,-15.672) ; C38.1@0.279,-15.382 C39.1@5.969,-15.382 ; C35.1@0.79,-2.322 cw(c0.79,-2.425) 0.864,-2.352 ccw(c0.925,-2.291) C35.1@0.925,-2.377 ; v1@3.669,-2.377 cw(c3.669,-4.84) v1(5.41,-3.099) ccw(c4.608,-3.185) C40.1@4.608,-2.377 ; C40.1@4.648,-2.337 C40.1@4.608,-2.377 ; C40.1@4.758,-2.507 cw(c2.962,-4.303) 5.502,-4.303 C46.1@5.502,-4.445 ; C47.1@5.527,-11.811 C46.1@5.527,-4.597 ; C35.1@0.925,-2.377 C40.1@4.608,-2.377
  Bottom Layer w1.5: -61.826,-4.753 cw(c-59.919,-6.661) FT245.3@-59.919,-3.962 ; FT245.3@-59.868,-3.937 -61.011,-3.937 -62.789,-5.715 -62.789,-17.475 -60.757,-19.507 -56.518,-19.507 C10.1@-49.925,-12.915 ; FT245.8@-57.379,-9.017 -51.867,-9.017 -45.872,-3.023 v3@-41.377,-3.023 ; -53.95,-9.779 -53.95,-13.36 -52.172,-15.138 ; R46_drivermotor2.1@-41.377,-23.8 -43.18,-21.996 -43.18,-13.868 -36.728,-7.417 -36.728,-4.115 v3(-36.703,-4.089)
  other v1: 10.744,-36.576 18.567,-31.674 27.889,-31.14 -35.611,-27.381 13.767,-26.111 15.824,-21.488 39.091,-17.628 -43.18,-16.561 0.279,-15.57 -5.791,-15.418 5.944,-15.392 3.759,-15.367 -7.671,-10.592 5.512,-10.084 1.295,-9.779 -7.645,-7.569 5.512,-7.061 -7.645,-4.013 33.299,-3.175 -5.918,-2.362 3.327,-2.362 33.299,-0.813 40.615,-0.737 8.484,2.007 -43.688,2.845 -44.806,3.861 -42.494,4.064 -43.663,5.105 31.725,17.475 2.337,19.456 21.514,19.456 0.991,25.984 -31.928,27.508 4.648,35.611 32.156,41.275
  other v2: -4.242,-29.743 10.109,28.6 10.82,29.261
  other v3: -6.96,-34.976
HALL1_drivermotor1: R10_drivermotor1.1 R47_drivermotor1.2 U12.82 | length 41.4
  Top Layer w0.203: -28.753,-4.216 -28.405,-4.564 U12.82@-11.617,-4.564
  Top Layer w0.381: R10_drivermotor1.1@-42.868,9.439 ccw(c-41.951,9.782) -42.204,8.836 ; R10_drivermotor1.1@-42.628,8.949 cw(c-42.628,7.238) -41.417,8.448 ; R10_drivermotor1.1@-42.57,9.106 cw(c-42.57,7.91) -41.725,8.756 ; v1(-42.57,9.55) -42.57,9.468 -42.674,9.365 -42.334,9.365 -28.753,-4.216 ; R10_drivermotor1.1@-42.168,9.409 ccw(c-41.661,9.409) -42.019,9.05 ; R10_drivermotor1.1@-42.126,9.55 ccw(c-41.175,9.55) -41.848,8.878
HALL1_drivermotor2: R10_drivermotor2.1 R47_drivermotor2.2 U12.108 | length 32.8
  Top Layer w0.203: -32.944,-18.136 -32.372,-17.564 U12.108@-11.617,-17.564
  Top Layer w0.6: R10_drivermotor2.1@-38.866,-23.97 cw(c-38.149,-24.133) R10_drivermotor2.1@-38.339,-23.422 ; R10_drivermotor2.1@-38.659,-23.851 -32.944,-18.136 ; R10_drivermotor2.1@-38.627,-23.499 ccw(c-38.627,-22.727) -38.081,-23.273 ; R10_drivermotor2.1@-38.277,-23.849 cw(c-37.359,-23.849) -38.008,-23.2 ; R10_drivermotor2.1@-38.273,-24.028 cw(c-36.912,-24.028) -37.874,-23.066
  other v1: -38.608,-24.028
HALL1_drivermotor3: R10_drivermotor3.1 R47_drivermotor3.2 U12.10 | length 37.3
  Top Layer w0.203: U12.10@9.433,-13.064 27.745,-13.064 28.372,-13.691
  Top Layer w0.6: 28.423,-13.691 R10_drivermotor3.1@39.37,-24.638 ; 38.81,-24.078 cw(c38.126,-24.761) R10_drivermotor3.1@39.093,-24.761 ; 38.838,-24.106 cw(c38.18,-24.765) R10_drivermotor3.1@39.111,-24.765 ; 38.931,-24.199 ccw(c39.443,-23.688) R10_drivermotor3.1@39.443,-24.411 ; 38.961,-24.229 ccw(c39.446,-23.744) R10_drivermotor3.1@39.446,-24.43
  other v1: 39.446,-24.765
HALL1_drivermotor4: R10_drivermotor4.1 R47_drivermotor4.2 U12.31 | length 42.7
  Top Layer w0.203: U12.31@9.433,-2.564 19.179,-2.564 19.634,-2.108
  Top Layer w0.381: 19.66,-2.134 35.56,13.767 37.109,13.767
  Top Layer w0.6: 37.109,13.741 43.028,13.741 R10_drivermotor4.1@43.332,13.437 ; 41.952,13.741 ccw(c41.952,15.153) R10_drivermotor4.1@42.95,14.155 ; 42.289,13.741 ccw(c42.289,14.81) R10_drivermotor4.1@43.045,14.054
  other v1: 43.282,13.818
HALL2_drivermotor1: R11_drivermotor1.1 R48_drivermotor1.2 U12.83 | length 41.4
  Top Layer w0.203: -30.645,-4.864 -30.447,-5.062 U12.83@-11.619,-5.062
  Top Layer w0.381: R11_drivermotor1.1@-43.811,7.811 ccw(c-43.029,8.089) R11_drivermotor1.1@-43.244,7.288 ; R11_drivermotor1.1@-43.567,7.375 cw(c-43.567,5.725) -42.401,6.891 ; R11_drivermotor1.1@-43.512,7.473 cw(c-43.512,6.194) -42.607,7.098 ; v1(-43.512,7.917) R11_drivermotor1.1@-43.342,7.747 ; R11_drivermotor1.1@-43.307,7.569 -43.078,7.569 -30.645,-4.864 ; R11_drivermotor1.1@-43.108,7.834 ccw(c-42.539,7.834) -42.941,7.432 ; R11_drivermotor1.1@-43.067,7.917 ccw(c-42.2,7.917) -42.813,7.304
HALL2_drivermotor2: R11_drivermotor2.1 R48_drivermotor2.2 U12.112 | length 36.4
  Top Layer w0.203: -30.328,-18.364 -29.954,-17.99 -8.823,-17.99 -8.342,-18.472 U12.112@-8.342,-19.339 ; -8.455,-18.359 cw(c-8.671,-18.575) U12.112@-8.366,-18.575
  Top Layer w0.6: R11_drivermotor2.1@-37.395,-25.402 cw(c-36.69,-25.534) R11_drivermotor2.1@-36.876,-24.841 ; R11_drivermotor2.1@-37.207,-24.93 ccw(c-37.207,-24.173) -36.672,-24.708 ; R11_drivermotor2.1@-37.122,-25.159 -30.328,-18.364 ; R11_drivermotor2.1@-36.857,-25.28 cw(c-35.924,-25.28) -36.584,-24.62 ; R11_drivermotor2.1@-36.8,-25.451 cw(c-35.317,-25.451) -36.365,-24.402
  other v1: -37.135,-25.451
HALL2_drivermotor3: R11_drivermotor3.1 R48_drivermotor3.2 U12.11 | length 38.5
  Top Layer w0.203: U12.11@9.433,-12.564 30.242,-12.564 30.709,-13.03
  Top Layer w0.6: 30.721,-13.018 R11_drivermotor3.1@40.932,-23.228 ; 40.322,-22.619 ccw(c41.017,-21.924) R11_drivermotor3.1@41.017,-22.906 ; 40.37,-22.666 cw(c39.668,-23.368) R11_drivermotor3.1@40.661,-23.368 ; 40.46,-22.756 cw(c39.959,-23.256) R11_drivermotor3.1@40.667,-23.256 ; R11_drivermotor3.1@40.554,-22.85 ccw(c40.996,-22.408) R11_drivermotor3.1@40.996,-23.033
  other v1: 40.996,-23.368
HALL2_drivermotor4: R11_drivermotor4.1 R48_drivermotor4.2 U12.32 | length 42.5
  Top Layer w0.203: U12.32@9.433,-2.064 18.815,-2.064 19.228,-1.651
  Top Layer w0.381: 19.228,-1.651 36.322,15.443 37.44,15.443
  Top Layer w0.6: 37.44,15.443 41.885,15.443 R11_drivermotor4.1@42.266,15.062 ; 40.96,15.443 ccw(c40.96,16.72) R11_drivermotor4.1@41.863,15.817 ; 41.319,15.443 ccw(c41.319,16.339) R11_drivermotor4.1@41.953,15.705 ; R11_drivermotor4.1@41.442,15.443 cw(c41.442,14.721) R11_drivermotor4.1@41.953,15.232
  other v1: 42.189,15.469
HALL3_drivermotor1: R9_drivermotor1.1 R46_drivermotor1.2 U12.80 | length 41.2
  Top Layer w0.203: -27.216,-3.416 -27.069,-3.564 U12.80@-11.617,-3.564
  Top Layer w0.381: R9_drivermotor1.1@-41.844,11.041 ccw(c-41.159,11.154) R9_drivermotor1.1@-41.339,10.483 ; R9_drivermotor1.1@-41.586,10.55 cw(c-41.586,9.574) -40.896,10.264 ; R9_drivermotor1.1@-41.549,11.032 cw(c-41.799,10.213) -40.973,10.435 ; R9_drivermotor1.1@-41.531,10.648 cw(c-41.531,10.043) -41.103,10.471 ; v1(-41.531,11.092) -41.531,10.898 -27.216,-3.416 ; R9_drivermotor1.1@-41.127,11.009 ccw(c-39.883,11.009) -40.762,10.13 ; R9_drivermotor1.1@-41.086,11.092 ccw(c-39.544,11.092) -40.635,10.002
HALL3_drivermotor2: R9_drivermotor2.1 R46_drivermotor2.2 U12.107 | length 33
  Top Layer w0.203: -35.23,-17.755 -34.539,-17.064 U12.107@-11.617,-17.064
  Top Layer w0.6: R9_drivermotor2.1@-39.98,-22.169 ccw(c-39.98,-21.361) -39.408,-21.933 ; R9_drivermotor2.1@-39.946,-22.156 ccw(c-39.946,-21.396) -39.408,-21.933 ; R9_drivermotor2.1@-39.802,-22.327 -35.23,-17.755 ; R9_drivermotor2.1@-39.645,-22.504 cw(c-38.836,-22.504) -39.408,-21.933 ; R9_drivermotor2.1@-39.596,-22.506 cw(c-38.665,-22.506) -39.323,-21.848
  other v1: -39.98,-22.504
HALL3_drivermotor3: R9_drivermotor3.1 R46_drivermotor3.2 U12.8 | length 35.8
  Top Layer w0.203: U12.8@9.433,-14.064 25.875,-14.064 26.441,-14.63
  Top Layer w0.6: 26.441,-14.63 R9_drivermotor3.1@37.96,-26.149 ; 37.275,-25.464 cw(c36.4,-26.34) R9_drivermotor3.1@37.638,-26.34 ; 37.395,-25.584 cw(c36.712,-26.267) R9_drivermotor3.1@37.678,-26.267 ; 37.517,-25.706 ccw(c38.028,-25.194) R9_drivermotor3.1@38.028,-25.917
  other v1: 37.973,-26.34
HALL3_drivermotor4: R9_drivermotor4.1 R46_drivermotor4.2 U12.30 | length 43.3
  Top Layer w0.203: U12.30@9.433,-3.064 19.618,-3.064 20.117,-2.565
  Top Layer w0.381: 20.142,-2.591 33.757,11.024 34.9,11.024
  Top Layer w0.6: 34.9,11.024 43.282,11.024 44.171,11.913 R9_drivermotor4.1@44.171,12.014 ; 43.513,11.255 cw(c44.406,10.362) R9_drivermotor4.1@44.406,11.624 ; 43.733,11.475 cw(c44.348,10.86) R9_drivermotor4.1@44.348,11.73 ; 43.794,11.536 ccw(c43.266,12.065) R9_drivermotor4.1@44.013,12.065
  other v1: 44.348,12.065
ID0: R3.2 S1.1 U2.9 | length 23.3
  Top Layer w0.305: U2.9@6.075,16.25 8.35,16.25 8.839,16.739 14.722,16.739 v1@15.027,16.434 ; U2.9@6.762,16.163 cw(c6.971,15.954) 6.971,16.25 cw(c6.971,16.546) U2.9@6.762,16.336 ; 12.39,16.739 cw(c12.39,13.492) v1@14.685,15.788 ; 13.126,16.739 cw(c13.126,14.228) v1@14.901,16.003 ; 13.862,16.739 cw(c13.862,14.964) v1@15.116,16.219 ; 14.597,16.739 cw(c14.597,15.7) v1@15.332,16.434 ; 14.723,16.737 ccw(c15.027,17.041) v1@15.027,16.612
  Top Layer w0.508: S1.1@14.432,14.571 ccw(c12.997,16.006) v1@15.027,16.006 ; v1@14.697,15.939 cw(c13.806,15.424) 14.799,15.158 ; v1@14.757,15.86 cw(c14.107,15.209) 15.027,15.209 cw(c15.946,15.209) v1@15.296,15.86 ; S1.1@14.791,14.212 15.027,14.447 v1(15.027,16.129) ; 14.839,15.306 cw(c15.623,15.097) v1@15.217,15.799
ID1: R4.2 S1.4 U2.11 | length 24.1
  Top Layer w0.305: U2.11@6.075,17.85 18.281,17.85 v1@19.599,19.167 ; U2.11@6.762,17.763 cw(c6.971,17.554) 6.971,17.85 cw(c6.971,18.146) U2.11@6.762,17.936 ; 18.721,18.289 ccw(c17.68,19.329) v1@19.152,19.329 ; 19.027,18.595 cw(c19.634,17.988) v1@19.634,18.847 ; 19.241,18.809 ccw(c18.721,19.329) v1@19.456,19.329
  Top Layer w0.508: v1@19.365,19.599 ccw(c18.8,20.163) 19.599,20.163 ; v1@19.599,19.167 19.599,21.559 S1.4@19.871,21.832 ; v1@19.599,19.947 cw(c21.756,19.947) S1.4@20.231,21.473 ; 19.599,20.335 ccw(c20.64,20.335) v1@19.904,19.599 ; 19.801,20.701 ccw(c21.281,20.304) v1@19.962,19.523
  other v1: 19.634,19.329
ID2: R5.2 S1.3 U2.10 | length 21.3
  Top Layer w0.305: U2.10@6.075,17.05 8.436,17.05 8.63,17.243 18.738,17.243 19.599,16.383 v1@19.599,16.205 ; U2.10@6.762,16.963 cw(c6.971,16.754) 6.971,17.05 cw(c6.971,17.346) U2.10@6.762,17.136 ; 18.738,17.243 ccw(c19.409,17.914) v1@19.592,16.984 ; 19.012,16.97 cw(c18.552,16.51) v1@19.202,16.51
  Top Layer w0.508: v1@19.416,16.241 cw(c18.315,15.14) 19.871,15.14 ; S1.3@19.512,14.571 ccw(c18.645,15.438) 19.871,15.438 ccw(c21.098,15.438) S1.3@20.231,14.571 ; v1@19.599,16.205 19.871,15.932 S1.3@19.871,14.212
  other v1: 19.685,16.51
ID3: R6.2 S1.6 U2.12 | length 18.1
  Top Layer w0.305: U2.12@6.075,18.65 14.118,18.65 v1(15.001,19.533) ; U2.12@6.762,18.563 cw(c6.971,18.354) 6.971,18.65 cw(c6.971,18.946) U2.12@6.762,18.736 ; v1@14.519,19.533 cw(c13.353,19.533) 14.177,18.709 cw(c15.001,17.885) v1@15.001,19.05
  Top Layer w0.508: S1.6@14.432,21.473 cw(c13.058,20.099) v1@15.001,20.099 ; v1@14.671,19.723 ccw(c13.441,20.433) 14.813,20.801 ; v1@14.732,19.802 ccw(c14.081,20.452) 15.001,20.452 ccw(c15.921,20.452) v1@15.271,19.802 ; S1.6@14.791,21.832 15.001,21.622 v1(15.001,19.533)
INIT: R33.1 U12.58 U13.8 | length 62.3
  Top Layer w0.203: v6@-4.089,3.867 cw(c-4.089,3.008) -3.482,3.615 ; v6@-4.074,4.207 -2.842,2.975 U12.58@-2.842,1.711 ; v6@-3.816,4.14 ccw(c-3.355,4.14) -3.681,3.814
  Top Layer w0.4: v1@-14.63,-31.495 U13.8@-12.4,-31.495 ; v1@-14.323,-31.854 cw(c-13.456,-32.721) -13.456,-31.495 ; v1@-14.323,-31.239 ccw(c-13.704,-30.621) -13.704,-31.495
  Bottom Layer w0.508: R33.1@-20.056,-17.068 cw(c-20.769,-17.781) -19.761,-17.781 ; R33.1@-20.056,-16.308 ccw(c-20.769,-15.595) -19.761,-15.595 ; -19.761,-17.707 cw(c-18.857,-17.707) R33.1@-19.496,-17.068 ; -19.761,-15.668 ccw(c-18.857,-15.668) R33.1@-19.496,-16.308 ; v1@-14.9,-31.816 ccw(c-15.55,-32.467) -15.55,-31.547 ccw(c-15.55,-30.627) v1@-14.9,-31.277 ; v1@-14.681,-31.547 -15.672,-31.547 -19.761,-27.457 -19.761,-3.734 -11.786,4.242 v6@-4.115,4.242 ; -4.627,4.242 cw(c-4.627,3.603) v6@-4.175,4.055
  other v1: -14.63,-31.547
  other v6: -4.089,4.14
IO1: pad.10 U12.113 | length 5.6
  Top Layer w0.203: pad.10@-8.2,-20.832 ccw(c-9.065,-19.967) U12.113@-7.842,-19.967 ; pad.10@-8.057,-20.976 ccw(c-8.575,-20.458) -7.842,-20.458 ; -7.913,-20.23 cw(c-7.742,-20.276) U12.113@-7.83,-20.123 ; U12.113@-7.854,-20.123 cw(c-7.983,-20.346) -7.734,-20.279 ; pad.10@-7.849,-21.336 -7.842,-21.33 U12.113@-7.842,-19.339 ; -7.842,-20.366 ccw(c-6.98,-20.366) pad.10@-7.59,-20.976 ; U12.113@-7.842,-19.875 ccw(c-6.49,-19.875) pad.10@-7.446,-20.832
IO56: pad.8 U12.122 | length 5.9
  Top Layer w0.203: pad.8@-5.785,-23.355 ccw(c-5.885,-23.103) -5.613,-23.103 ; pad.8@-5.779,-23.609 -5.613,-23.444 -5.613,-23.103 ; pad.8@-5.437,-23.339 cw(c-5.367,-23.103) -5.613,-23.103 ; U12.122@-3.342,-19.339 -3.342,-20.831 -5.613,-23.103
IO105: pad.2 U12.123 | length 8.8
  Top Layer w0.203: pad.2@-4.365,-23.473 ccw(c-4.785,-23.053) -4.191,-23.053 ; pad.2@-4.191,-24.054 -4.191,-22.25 ; -4.191,-23.133 ccw(c-3.374,-23.133) pad.2@-3.905,-23.754 ; -4.191,-22.692 ccw(c-2.996,-22.692) pad.2@-3.773,-23.6 ; pad.2@-3.641,-23.445 cw(c-2.618,-22.25) -4.191,-22.25 ; U12.123@-2.842,-19.339 -2.842,-20.902 -4.191,-22.25
IO107: pad.12 U12.124 | length 3.7
  Top Layer w0.203: pad.12@-2.819,-22.327 -2.342,-21.849 ; pad.12@-2.583,-21.869 ccw(c-2.474,-21.717) -2.342,-21.849 ; pad.12@-2.398,-22.11 cw(c-2.169,-22.022) -2.342,-21.849 ; U12.124@-2.342,-19.339 -2.342,-21.849
IO108: pad.3 U12.125 | length 5.4
  Top Layer w0.203: pad.3@-2.261,-23.647 -1.842,-23.229 ; pad.3@-2.207,-23.271 ccw(c-2.051,-23.02) -1.842,-23.229 ; pad.3@-1.965,-23.625 cw(c-1.528,-23.544) -1.842,-23.229 ; U12.125@-1.842,-19.202 -1.842,-23.229
IO112: pad.9 U12.118 | length 10.2
  Top Layer w0.203: pad.9@-7.89,-22.9 cw(c-7.143,-23.303) -7.143,-22.454 ; pad.9@-7.849,-22.86 -7.442,-22.454 -6.121,-22.454 ; pad.9@-7.711,-22.996 cw(c-6.802,-23.486) -6.802,-22.454 ; pad.9@-7.533,-23.093 cw(c-6.462,-23.67) -6.462,-22.454 ; pad.9@-7.354,-23.189 cw(c-6.121,-23.853) -6.121,-22.454 ; U12.118@-5.342,-19.339 -5.342,-21.674 -6.121,-22.454
IO113: pad.7 U12.119 | length 10.3
  Top Layer w0.203: pad.7@-7.823,-24.384 ccw(c-7.823,-23.526) -7.216,-24.133 ; pad.7@-7.823,-24.181 ccw(c-7.823,-22.832) -6.869,-23.786 ; pad.7@-7.823,-23.978 ccw(c-7.823,-22.138) -6.522,-23.439 ; pad.7@-7.798,-24.486 -7.569,-24.486 -4.842,-21.759 U12.119@-4.842,-19.339 ; pad.7@-7.29,-24.511 cw(c-6.554,-24.511) -7.074,-23.991
IO125: pad.11 U12.116 | length 5.3
  Top Layer w0.203: pad.11@-6.727,-20.959 ccw(c-7.657,-20.029) U12.116@-6.342,-20.029 ; pad.11@-6.583,-21.103 ccw(c-7.166,-20.52) -6.342,-20.52 ; pad.11@-6.35,-21.336 -6.342,-21.328 U12.116@-6.342,-19.339 ; -6.342,-20.558 ccw(c-5.572,-20.558) pad.11@-6.117,-21.103 ; U12.116@-6.342,-20.067 ccw(c-5.081,-20.067) pad.11@-5.973,-20.959
IO130: pad.14 U12.131 | length 4.1
  Top Layer w0.203: pad.14@1.158,-21.514 U12.131@1.158,-19.339 ; 1.158,-20.768 ccw(c2.118,-20.768) pad.14@1.439,-21.446 ; 1.158,-20.277 ccw(c2.608,-20.277) pad.14@1.583,-21.303